# Altium PCB Mako DSP R1.4.PcbDoc (part 2 of 2)
Units mil, origin at the board's own origin, x right, y up, seen from the top; angles counter-clockwise.
Board outline 4040 x 2100 mil, 4 copper layers (Top Layer, GND, Power, Bottom Layer); 157 components, 143 nets, 609 pads, 252 vias.
Unrouted connection lines stored in the file: 4.
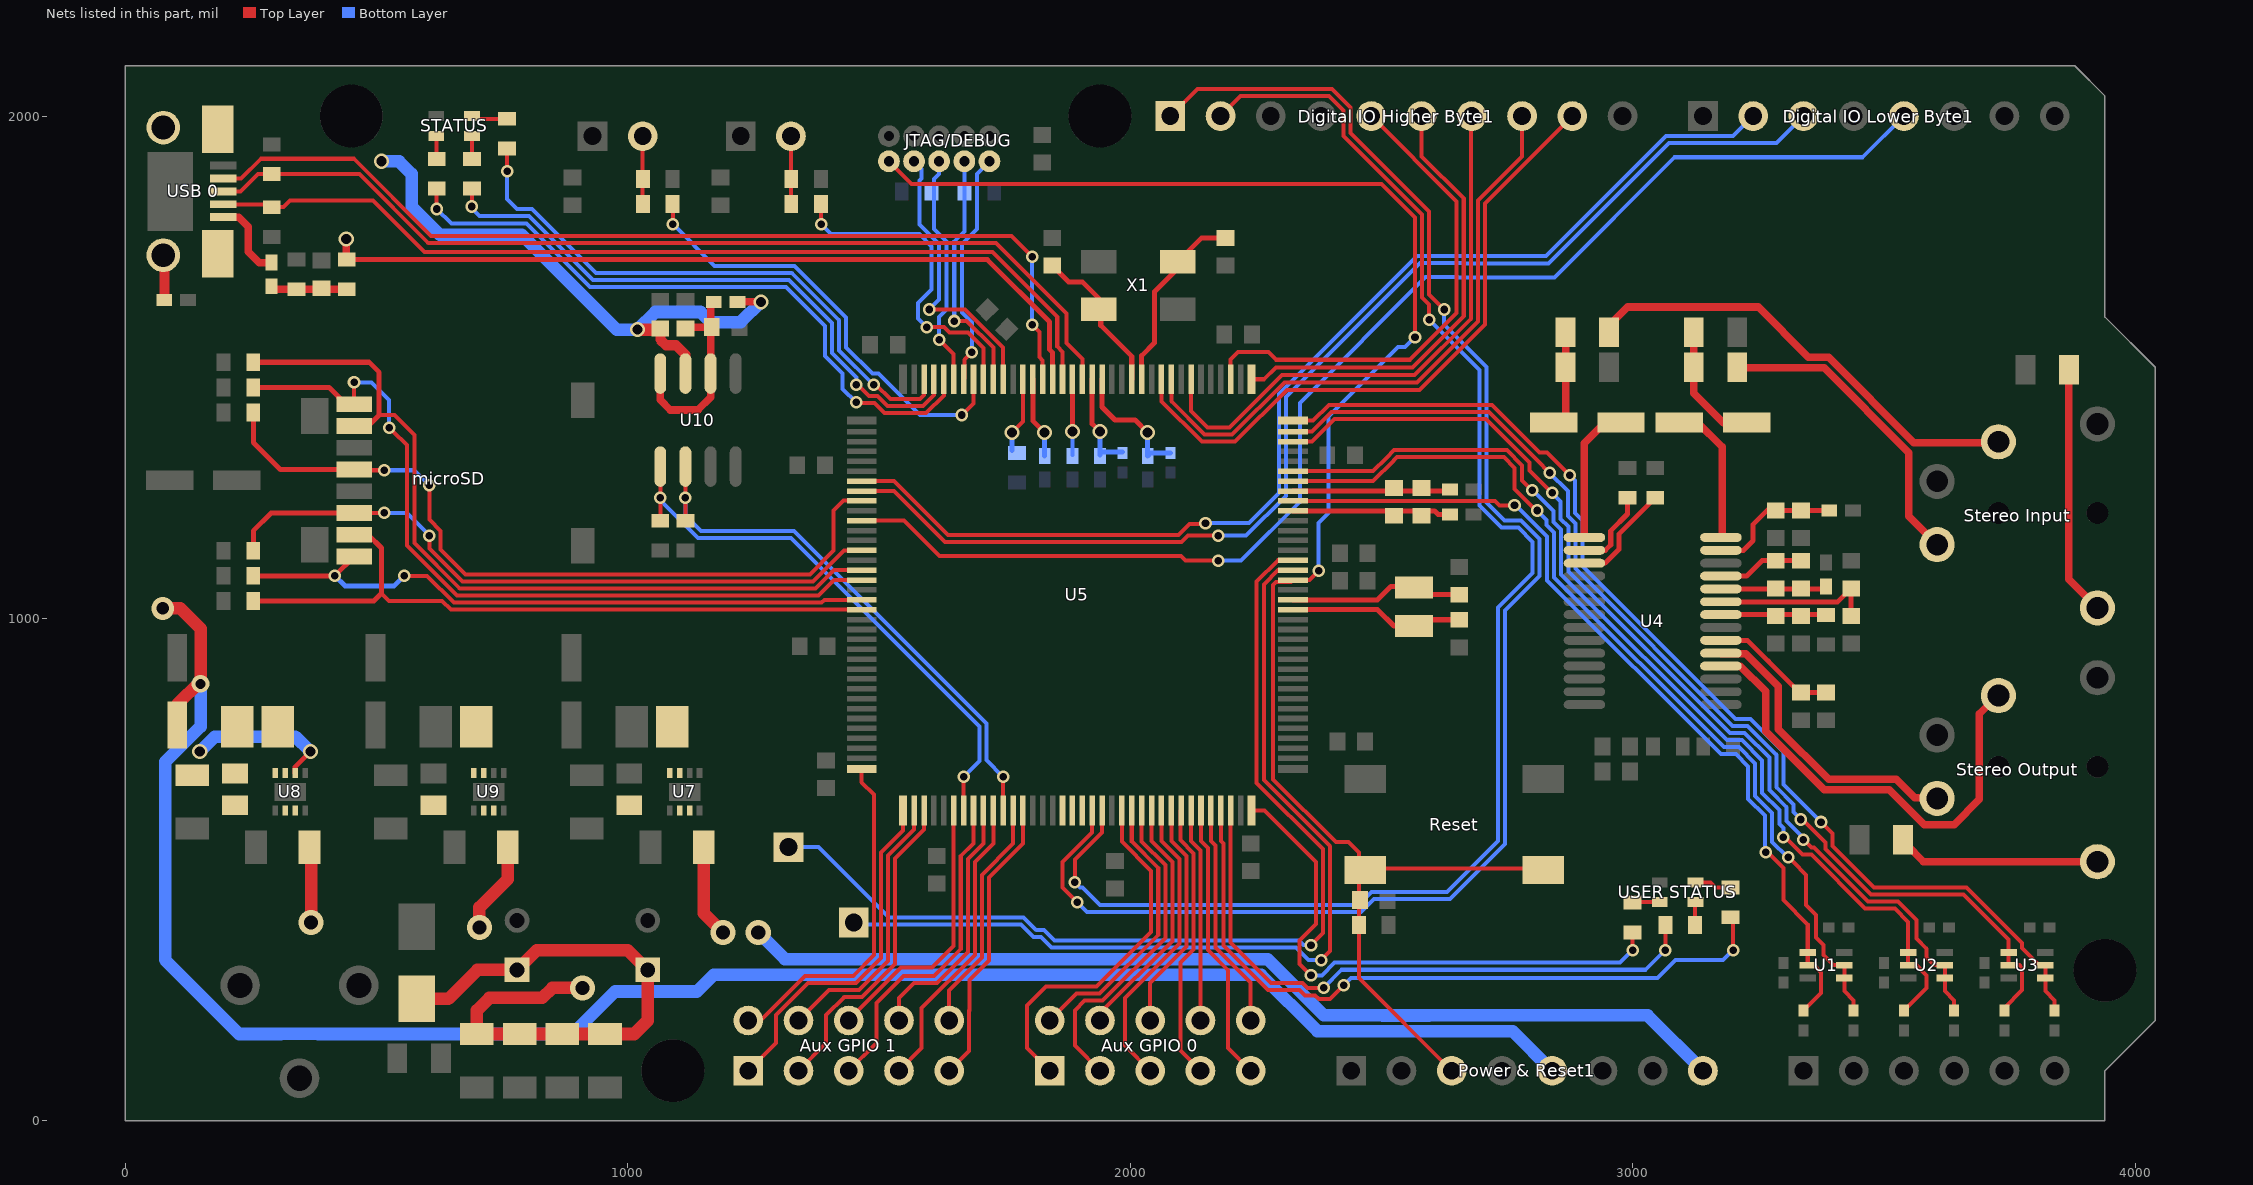
[diagram p4: the nets of this part, all layers, seen from the top]

## Via types
v1: diameter 30, hole 20, Top Layer to Bottom Layer, 120 vias
v2: diameter 25, hole 15, Top Layer to Bottom Layer, 115 vias
v3: diameter 50, hole 28, Top Layer to Bottom Layer, 7 vias
v4: diameter 19.68, hole 7.87, Top Layer to Bottom Layer, 6 vias
v5: diameter 45, hole 25, Top Layer to Bottom Layer, 2 vias
v6: diameter 35, hole 20, Top Layer to Bottom Layer, 1 vias
v7: diameter 45, hole 28, Top Layer to Bottom Layer, 1 vias

## Nets (pads, with @x,y where several pads share a name; then routed paths per layer and width w, separated by ;. In a path a pad name is that pad's centre, name@x,y a point inside that pad or via, vN(x,y) a via of type N, cw(c..) or ccw(c..) an arc to the next point about the centre after c; other vN are vias at no path point) (continued)
"NetAux GPIO 0_1": "Aux GPIO 0.1" U5.95 | length 722.2
  Top Layer w8: 1840,100 1795,145 1795,230 1832.53,267.53 1933.53,267.53 2042,375.99 2042,498 1983.58,556.42 U5.95@1983.58,617.91
"NetAux GPIO 0_2": "Aux GPIO 0.2" U5.96 | length 556.1
  Top Layer w8: 1840,200 1893.53,253.53 1939.33,253.53 2056,370.2 2056,503.8 2003.27,556.53 U5.96@2003.27,617.91
"NetAux GPIO 0_3": "Aux GPIO 0.3" U5.97 | length 653.5
  Top Layer w8: 1940,100 1890,150 1890,220 1909.53,239.53 1945.13,239.53 2070,364.4 2070,509.6 2023,556.6 U5.97@2022.95,617.91 U5.97@2022.95,617.91
"NetAux GPIO 0_4": "Aux GPIO 0.4" U5.98 | length 494.7
  Top Layer w8: 1940,200 1940,214.6 2084,358.6 2084,515.4 2042.64,556.76 U5.98@2042.64,617.91
"NetAux GPIO 0_5": "Aux GPIO 0.5" U5.99 | length 598.1
  Top Layer w8: 2040,100 1990,150 1990,244.8 2098,352.8 2098,521.2 2062.32,556.87 U5.99@2062.32,617.91
"NetAux GPIO 0_6": "Aux GPIO 0.6" U5.100 | length 460.2
  Top Layer w8: 2040,200 2040,275 2112,347 2112,526.99 2082.01,556.99 U5.100@2082.01,617.91
"NetAux GPIO 0_7": "Aux GPIO 0.7" U5.101 | length 556
  Top Layer w8: U5.101@2100,617.91 2100,558.79 2126,532.79 2126,341.2 2100,315.2 2100,140 2140,100
"NetAux GPIO 0_8": "Aux GPIO 0.8" U5.102 | length 425.6
  Top Layer w8: U5.102@2121.38,617.91 2121.38,557.21 2140,538.59 2140,200
"NetAux GPIO 0_9": "Aux GPIO 0.9" U5.103 | length 558.9
  Top Layer w8: U5.103@2141.06,617.91 2141.06,557.33 2155,543.39 2155,340 2195,300 2195,145 2240,100
"NetAux GPIO 0_10": "Aux GPIO 0.10" U5.104 | length 450.7
  Top Layer w8: U5.104@2160.75,617.91 2160.75,557.44 2170,548.19 2170,345.4 2240,275.4 2240,200
"NetAux GPIO 1_1": "Aux GPIO 1.1" U5.73 | length 701.6
  Top Layer w8: 1240,100 1295,155 1295,210.9 1359.1,275 1454.8,275 1504,324.2 1504,534 1548.15,578.15 U5.73@1548.15,617.91
"NetAux GPIO 1_2": "Aux GPIO 1.2" U5.72 | length 684
  Top Layer w8: 1240,200 1264.3,200 1353.3,289 1449,289 1490,330 1490,650 1465.87,674.13 U5.72@1465.87,700.2
"NetAux GPIO 1_3": "Aux GPIO 1.3" U5.75 | length 642.1
  Top Layer w8: 1340,100 1395,155 1395,210.9 1431.1,247 1466.4,247 1532,312.6 1532,522.4 1589.88,580.28 U5.75@1589.88,617.91
"NetAux GPIO 1_4": "Aux GPIO 1.4" U5.74 | length 548.2
  Top Layer w8: 1340,200 1401,261 1460.6,261 1518,318.4 1518,528.2 1570.2,580.4 U5.74@1570.2,617.91
"NetAux GPIO 1_5": "Aux GPIO 1.5" U5.80 | length 656.4
  Top Layer w8: 1440,100 1495,155 1495,235.2 1548.8,289 1609.6,289 1662.94,342.33 1662.94,527.13 1688.31,552.5 U5.80@1688.31,617.91
"NetAux GPIO 1_6": "Aux GPIO 1.6" U5.78 | length 540.5
  Top Layer w8: 1440,200 1440,200.8 1544.2,305 1605.8,305 1648.94,348.13 U5.78@1648.94,617.91
"NetAux GPIO 1_7": "Aux GPIO 1.7" U5.82 | length 595.7
  Top Layer w8: 1540,100 1585,145 1585,224.8 1690.94,330.74 1690.94,515.53 1727.68,552.28 U5.82@1727.68,617.91
"NetAux GPIO 1_8": "Aux GPIO 1.8" U5.81 | length 514.1
  Top Layer w8: 1540,200 1540,245 1570,275 1615.4,275 1676.94,336.53 1676.94,521.33 1707.99,552.39 U5.81@1707.99,617.91
"NetAux GPIO 1_9": "Aux GPIO 1.9" U5.85 | length 578.7
  Top Layer w8: 1640,100 1679.53,139.53 1679.53,219.53 1680,220 1680,280.2 1718.94,319.14 1718.94,484.14 1786.73,551.93 U5.85@1786.73,617.91
"NetAux GPIO 1_10": "Aux GPIO 1.10" U5.84 | length 470.5
  Top Layer w8: 1640,200 1640,260 1704.94,324.94 1704.94,489.94 1767.05,552.05 U5.84@1767.05,617.91
NetC10_1: C10.1 C11.1 FB13.1 U4.27 | length 260.6
  Top Layer w10: U4.27@3175.83,1135.75 3220.56,1135.75 3240,1155.19 3240,1187.56 C10.1@3275,1222.56 ; C10.1@3285,1215.12 3285.04,1215.16 FB13.1@3391.54,1215.16
NetC12_2: C12.2 C13.2 R3.1 U4.22 | length 209.5
  Top Layer w10: U4.22@3175.83,1007.8 3384.29,1007.8 R3.1@3385,1007.09
NetC14_1: C14.1 C15.1 FB17.1 U4.24 | length 209.2
  Top Layer w10: U4.24@3175.83,1058.98 FB17.1@3385,1058.98
NetC14_2: C14.2 C15.2 U4.25 | length 171.8
  Top Layer w10: U4.25@3175.83,1084.57 3227.01,1084.57 3257.56,1115.12 C15.2@3335,1115.12
NetC16_2: C16.2 C17.2 U4.23 | length 325.8
  Top Layer w10: U4.23@3175.83,1033.39 3176.65,1032.56 3407.56,1032.56 C16.2@3435,1060 C17.2@3435,1005.12
NetC18_2: C18.2 C19.2 U4.20 | length 252.3
  Top Layer w10: U4.20@3175.83,956.61 3228.39,956.61 3270,915 3332.46,852.56 C19.2@3385,852.56
NetC20_1: C20.1 U4.1 | length 277.5
  Top Layer w15: U4.1@2904.17,1161.34 2904.17,1349.17 2945,1390 C20.1@2976.93,1390
NetC20_2: C20.2 C21.2 R4.1 | length 181.5
  Top Layer w15: C20.2@2863.07,1390 2866.69,1393.62 C21.2@2866.69,1500 R4.1@2866.69,1570
NetC22_1: C22.1 U4.28 | length 286.9
  Top Layer w15: C22.1@3093.07,1390 3130,1390 3178.66,1341.34 3178.66,1164.17 U4.28@3175.83,1161.34
NetC22_2: C22.2 C23.2 R5.1 | length 251.1
  Top Layer w15: C23.2@3121.69,1570 3121.69,1448.31 3180,1390 C22.2@3226.93,1390
NetC24_2: C24.2 FB2.2 U5.16 | length 261.1
  Top Layer w10: U5.16@1944.21,1476.18 1944.21,1420.79 1970,1395 2010,1395 v1(2035,1370)
  Bottom Layer w10: v1(2035,1370) FB2.2@2035,1323.62 2041.06,1329.69 C24.2@2080,1329.69
NetC25_2: C25.2 FB1.2 U5.17 | length 195.9
  Top Layer w10: U5.17@1924.53,1476.18 1924.53,1387.52 v1(1940,1372.05)
  Bottom Layer w10: FB1.2@1940,1325.67 v1(1940,1372.05) ; FB1.2@1946.06,1331.73 C25.2@1985,1331.73
NetC30_1: C30.1 U5.13 X1.3 | length 306.3
  Top Layer w10: C30.1@1845,1702.44 1877.44,1670 1905,1670 1937.52,1637.48 X1.3@1937.52,1615.51 ; X1.3@1941.54,1615.51 1941.54,1583.46 2003.27,1521.73 U5.13@2003.27,1476.18
NetC31_2: C31.2 U5.12 X1.1 | length 378.4
  Top Layer w10: U5.12@2022.95,1476.18 2022.95,1522.95 2048.57,1548.57 2048.57,1650.34 2095,1696.77 X1.1@2095,1710 2142.56,1757.56 C31.2@2190,1757.56
NetC63_2: C63.2 C64.2 FB7.1 U10.6 U10.8 | length 417.3
  Top Layer w8: FB7.1@1165,1623.62 FB7.1@1171.38,1630
  Top Layer w15: U10.8@1065,1487.52 1065,1435 1085,1415 1140,1415 1165,1440 U10.6@1165,1487.52 C64.2@1165,1580 ; C63.2@1115,1577.44 1117.56,1580 C64.2@1165,1580 ; FB7.1@1165,1623.62 C64.2@1165,1580 ; C64.2@1167.44,1580 C64.2@1165,1580
NetC68_2: C68.2 FB10.1 R27.1 R29.1 | length 152.4
  Top Layer w10: FB10.1@290.96,1661.12 FB10.1@296.87,1655.21
  Top Layer w15: FB10.1@296.87,1655.21 R29.1@340.96,1655.21 R27.1@440.96,1655.21
NetDBGEN1_2: DBGEN.2 R15.2 R16.2 | length 134.5
  Top Layer w8: R15.2@1325,1825.47 DBGEN.2@1325,1960
NetFB3_1: FB3.1 U5.23 | length 162.3
  Top Layer w10: U5.23@1806.42,1476.18 1806.42,1393.58 v1(1830,1370)
  Bottom Layer w10: FB3.1@1830,1323.62 v1(1830,1370)
NetFB4_1: FB4.1 U5.19 | length 150.6
  Top Layer w8: U5.19@1885,1476.02 U5.19@1885.16,1476.18
  Top Layer w10: v1(1885,1372.05) U5.19@1885,1476.02
  Bottom Layer w8: FB4.1@1885,1325.67 v1(1885,1372.05)
NetFB10_2: "USB 0.1" FB10.2 | length 162.7
  Top Layer w15: 195,1798.82 226.18,1798.82 245,1780 245,1730 266.64,1708.36 FB10.2@290.96,1708.36
NetFB12_1: "USB 0.6" "USB 0.7" "USB 0.8" "USB 0.9" FB12.1 | length 89.8
  Top Layer w8: 75.91,1723.03 77.91,1721.02
  Top Layer w20: FB12.1@77.91,1634.02 77.91,1721.02
NetFB14_1: "Stereo Input.5" FB14.1 | length 493.3
  Top Layer w15: FB14.1@3868.31,1495 3868.31,1077.72 3915,1031.02 3925,1031.02
NetFB15_1: "Stereo Output.5" FB15.1 | length 423.5
  Top Layer w15: FB15.1@3538.31,545 3544.15,550.85 3578.98,516.02 3945,516.02
NetJ3_4: "USB 0.4" U5.22 | length 1959.7
  Top Layer w8: 195,1875.59 230.59,1875.59 270,1915 455.25,1915 608.99,1761.27 1763.73,1761.27 v2(1805,1720) ; v2(1805,1585) 1820,1570 1820,1520 1826.1,1513.9 U5.22@1826.1,1476.18
  Bottom Layer w8: v2(1805,1585) v2(1805,1720)
NetL1_1: L1.1 U7.7
NetL2_1: L2.1 U8.7
NetL3_1: L3.1 U9.7
NetR4_2: "Stereo Input.4" R4.2 | length 920
  Top Layer w15: R4.2@2953.31,1570 2953.31,1583.31 2990,1620 3250,1620 3350,1520 3390,1520 3560,1350 3716.42,1350 3728.15,1361.73
NetR5_2: "Stereo Input.1" R5.2 | length 627.7
  Top Layer w15: R5.2@3208.31,1500 R5.2@3213.31,1500 ; R5.2@3213.31,1486.69 R5.2@3213.31,1500 ; 3606.1,1157.01 3596.1,1157.01 3550,1203.11 3550,1330.3 3381.3,1499 3214.31,1499 R5.2@3213.31,1500
NetR6_2: R6.2 U4.2 | length 164.6
  Top Layer w10: U4.2@2904.17,1135.75 2945.75,1135.75 2956.51,1146.51 2956.51,1174.61 2990,1208.1 R6.2@2990,1240.47
NetR7_2: R7.2 U4.3 | length 212.7
  Top Layer w10: U4.3@2904.17,1110.16 2945.16,1110.16 2972.51,1137.51 2972.51,1167.98 R7.2@3045,1240.47
NetR8_2: R8.2 U5.24 | length 150.7
  Top Layer w8: v1(1765,1370) 1786.73,1391.73 U5.24@1786.73,1476.18
  Bottom Layer w10: R8.2@1765,1334.53 v1(1765,1370)
NetR13_2: R13.2 R14.2 TRST.2 | length 134.5
  Top Layer w8: R13.2@1030,1825.47 TRST.2@1030,1960
NetR15_1: R15.1 U5.28 | length 650.4
  Top Layer w8: R15.1@1384.53,1825 1385,1824.53 v2(1385,1785) ; v2(1595,1580) 1630,1580 1640.45,1569.55 1677.27,1569.55 1707.99,1538.83 U5.28@1707.99,1476.18
  Bottom Layer w8: v2(1385,1785) 1405,1765 1580.4,1765 1605,1740.4 1605,1655 1577.5,1627.5 1577.5,1597.5 v2(1595,1580)
NetR19_1: R19.1 U7.8
NetR20_1: R20.1 U8.8
NetR21_1: R21.1 U9.8
NetR23_2: R23.2 STATUS.3 | length 46.1
  Top Layer w8: R23.2@690,1914.53 STATUS.3@690,1960.63
NetR24_1: R24.1 STATUS.4 | length 46.5
  Top Layer w8: STATUS.4@619.13,1960.63 619.13,1915.39 R24.1@620,1914.53
NetR25_2: R25.2 STATUS.2 | length 72.3
  Top Layer w8: STATUS.2@690,2000 695.47,1994.53 R25.2@760,1994.53
NetR26_2: "USER STATUS.3" R26.2 | length 45.8
  Top Layer w8: R26.2@3124.53,390 3124.53,435.16 3125,435.63
NetR28_1: "USER STATUS.4" R28.1 | length 54.6
  Top Layer w8: R28.1@3000,434.53 3001.1,435.63 3054.13,435.63
NetR30_2: "USER STATUS.2" R30.2 | length 74.3
  Top Layer w8: 3125,475 3155,475 3165.47,464.53 R30.2@3195,464.53
NetR34_2: R34.2 U1.1 U1.2 U5.136 | length 1745.8
  Top Layer w8: U5.136@2324.13,1234.05 2324.33,1233.86 2726.14,1233.86 2735,1225 v2(2765,1225) ; v2(3265,535) 3268.18,535 3300,503.18 3300,440 3348.58,391.42 U1.1@3348.58,335.59 U1.2@3348.58,310 3361.07,310 3375.31,295.76 3375.31,255 R34.2@3340,219.69
  Bottom Layer w8: v2(2765,1225) 2768.18,1225 2830,1163.18 2830,1076.01 3176.01,730 3205.67,730 3230,705.67 3230,641.01 3263.5,607.51 3263.5,536.5 v2(3265,535)
NetR35_2: R35.2 U1.4 U1.5 U5.138 | length 1847.2
  Top Layer w8: U5.138@2324.13,1273.43 2483.58,1273.43 2524,1313.85 2524,1314 2531,1321 2744,1321 2765,1300 2765,1258.18 2808.18,1215 v2(2810,1215) ; 3320,515 3345,490 3345,430 3365,410 3365,365 3380,350 3380,330 3400,310 U1.5@3421.42,310 U1.4@3421.42,284.41 3421.42,258.58 3440,240 R35.2@3440,219.69
  Bottom Layer w8: v2(2810,1215) 2829,1196 2829,1186 2844,1171 2844,1081.8 3181.8,744 3211.47,744 3244,711.47 3244,646.8 3277.5,613.3 3277.5,555.68 3308.18,525 v2(3310,525)
NetR36_2: R36.2 U2.1 U2.2 U5.139 | length 1998.1
  Top Layer w8: U5.139@2324.13,1293.11 2483.47,1293.11 2510,1319.64 2510,1319.8 2525.2,1335 2750,1335 2780,1305 2780,1275 v2(2800,1255) ; v2(3300,565) 3303.18,565 3338.18,530 3355.6,530 3462.6,423 3522,423 3548.58,396.42 U2.1@3548.58,335.59 U2.2@3548.58,310 3565,310 3585,290 3585,265 3540,220 R36.2@3540,219.69
  Bottom Layer w8: v2(2800,1255) 2801.82,1255 2843,1213.82 2843,1192 2858,1177 2858,1087.6 3187.6,758 3217.27,758 3258,717.27 3258,652.6 3292,618.6 3292,591.38 3300,583.38 v2(3300,565)
NetR37_2: R37.2 U2.4 U2.5 U5.142 | length 2034
  Top Layer w8: U5.142@2324.13,1352.17 2362.17,1352.17 2407,1397 2708.4,1397 2795,1310.4 2795,1295 v2(2840,1250) ; v2(3340,560) 3356,544 3361.4,544 3468.4,437 3528,437 3565,400 3565,362.8 3585,342.8 3585,325 3600,310 U2.5@3621.42,310 U2.4@3621.42,284.41 3621.42,258.58 3640,240 R37.2@3640,219.69
  Bottom Layer w8: v2(2840,1250) 2857,1233 2857,1198.2 2872,1183.2 2872,1093.4 3193.4,772 3223.07,772 3272,723.07 3272,658.4 3306,624.4 3306,597.18 3340,563.18 v2(3340,560)
NetR38_2: R38.2 U3.1 U3.2 U5.143 | length 2191.8
  Top Layer w8: U5.143@2324.13,1371.85 2362.05,1371.85 2401.2,1411 2714.2,1411 2810,1315.2 2810,1315 v2(2835,1290) ; v2(3335,600) 3338.18,600 3384,554.18 3384,541.2 3474.2,451 3659,451 3748.58,361.42 U3.1@3748.58,335.59 U3.2@3748.58,310 3770,310 3775.31,304.68 3775.31,260.32 3740,225 R38.2@3740,219.69
  Bottom Layer w8: v2(2835,1290) 2871,1254 2871,1204 2886,1189 2886,1099.2 3199.2,786 3228.87,786 3286,728.87 3286,664.2 3320,630.2 3320,615 v2(3335,600)
NetR39_2: R39.2 U3.4 U3.5 U5.144 | length 2219.6
  Top Layer w8: U5.144@2324.13,1393.9 2364.3,1393.9 2395.4,1425 2720,1425 2815,1330 2830,1330 v2(2875,1285) ; v2(3375,595) 3398,572 3398,547 3480,465 3665,465 3775.31,354.68 3775.31,343.93 3809.24,310 U3.5@3821.42,310 U3.4@3821.42,284.41 3821.42,258.58 3840,240 R39.2@3840,219.69
  Bottom Layer w8: v2(2875,1285) 2885,1275 2885,1210 2900,1195 2900,1105 3205,800 3234.66,800 3300,734.66 3300,670 v2(3375,595)
NetR40_2: microSD.1 R40.2 U5.55 | length 1306.3
  Top Layer w8: v2(555.47,1085.08) 600.73,1085.08 654.28,1031.52 1385.92,1031.52 1391.6,1037.2 U5.55@1465.87,1037.2
  Top Layer w10: R40.2@255,1085 v2(417.32,1085) microSD.1@455.75,1123.43
  Bottom Layer w10: v2(417.32,1085) 437.32,1065 535.39,1065 v2(555.47,1085.08)
NetR41_2: microSD.2 R41.2 U5.56 | length 1386.1
  Top Layer w8: 510,1050 524.92,1035.08 630.93,1035.08 648.49,1017.52 U5.56@1465.87,1017.52
  Top Layer w10: R41.2@255,1035 495,1035 510,1050 510,1140.47 483.74,1166.73 microSD.2@455.75,1166.73
NetR42_2: microSD.3 R42.2 U5.50 | length 1362.2
  Top Layer w8: microSD.3@455.79,1210.08 v2(515.47,1210.08) ; v2(605.47,1165.08) 605.47,1139.73 671.68,1073.52 1368.52,1073.52 1430.63,1135.63 U5.50@1465.87,1135.63
  Top Layer w10: R42.2@255,1135 255,1174.53 290.51,1210.04 microSD.3@455.75,1210.04
  Bottom Layer w8: v2(515.47,1210.08) 560.47,1210.08 v2(605.47,1165.08)
NetR43_2: microSD.5 R43.2 U5.45 | length 1546
  Top Layer w8: microSD.5@457.32,1295.08 v2(515.47,1295.08) ; v2(605.47,1265.08) 605.47,1196.9 627.97,1174.4 627.97,1137.03 677.48,1087.52 1362.52,1087.52 1410,1135 1410,1215 1430,1235 U5.45@1465,1235
  Top Layer w10: R43.2@255,1410 255,1350.47 308.82,1296.65 microSD.5@455.75,1296.65
  Bottom Layer w8: v2(515.47,1295.08) 575.47,1295.08 v2(605.47,1265.08)
NetR44_2: microSD.7 R44.2 U5.52 | length 1647.2
  Top Layer w8: 505.47,1405 535.55,1405 575.47,1365.08 575.47,1149.93 665.88,1059.52 1374.32,1059.52 1411.06,1096.26 U5.52@1465.87,1096.26
  Top Layer w10: R44.2@255,1510 485.47,1510 505.47,1490 505.47,1405 483.74,1383.27 microSD.7@455.75,1383.27
NetR45_2: microSD.8 R45.2 U5.53 | length 1581
  Top Layer w8: microSD.8@455.47,1426.85 v2(455.47,1470.08) ; v2@532.97,1372.58 560.47,1345.08 560.47,1145.13 660.08,1045.52 1380.12,1045.52 1411.17,1076.57 U5.53@1465.87,1076.57
  Top Layer w10: R45.2@255,1460 405.55,1460 microSD.8@440.47,1425.08
  Bottom Layer w8: v2(455.47,1470.08) 490.47,1470.08 525.47,1435.08 v2(525.47,1380.08)
NetRTCALARM1_1: RTCALARM.1 U5.129 | length 1840.9
  Top Layer w8: U5.129@2324.13,1096.26 2294.52,1096.26 2266,1067.74 2266,678.8 2398,546.8 2398,338 v2(2380,320)
  Bottom Layer w8: RTCALARM.1@1450,395 1454,391 1782.38,391 1807.38,366 1822.58,366 1843.58,345 2330,345 2355,320 v2(2380,320)
"NetStereo Output1_1": "Stereo Output.1" U4.19 | length 599.4
  Top Layer w15: U4.19@3175.83,931.02 3176.85,930 3225,930 3290,865 3290,780 3390,680 3524.7,680 3561.75,642.95 3606.1,642.95
"NetStereo Output1_4": "Stereo Output.4" U4.18 | length 956
  Top Layer w15: U4.18@3175.55,905.16 U4.18@3175.83,905.43 3214.57,905.43 3265,855 3265,775.3 3381.3,659 3511,659 3580,590 3640,590 3690,640 3690,810 3726.73,846.73 3748.15,846.73
NetU5_89: U5.89
NetU5_90: U5.90
NetU5_91: U5.91
NetU5_130: U5.130 WAKEUP.1 | length 1998.6
  Top Layer w8: U5.130@2324.13,1115.94 2294.41,1115.94 2252,1073.54 2252,673 2384,541 2384,374 v2(2360,350)
  Bottom Layer w8: WAKEUP.1@1320,545 1380,545 1520,405 1788.18,405 1813.18,380 1828.38,380 1849.38,359 2335.8,359 2344.8,350 v2(2360,350)
PWM_3: "Digital IO Lower Byte1.5" U5.47 | length 2589.4
  Top Layer w8: U5.47@1465.87,1194.68 1549.71,1194.68 1620.4,1124 2101,1124 2110,1115 v2(2175,1115)
  Bottom Layer w8: v2(2175,1115) 2220.6,1115 2338,1232.4 2338,1429.22 2588.28,1679.5 2651.72,1679.5 2652.22,1679 2844.6,1679 3083.6,1918 3458,1918 3540,2000
PWM_5: "Digital IO Lower Byte1.3" U5.44 | length 2383.2
  Top Layer w8: U5.44@1465.87,1253.74 1530.25,1253.74 1631.99,1152 2102,1152 2115,1165 v2(2175,1165)
  Bottom Layer w8: v2(2175,1165) 2231.01,1165 2310,1243.99 2310,1440.81 2576.69,1707.5 2663.31,1707.5 2663.81,1707 2833.01,1707 3072.01,1946 3286,1946 3340,2000
PWM_6: "Digital IO Lower Byte1.2" U5.43 | length 2279.8
  Top Layer w8: U5.43@1465.87,1273.43 1530.37,1273.43 1637.79,1166 2096.2,1166 2118.37,1188.17 2148.17,1188.17 v2(2150,1190)
  Bottom Layer w8: v2(2150,1190) 2236.21,1190 2296,1249.79 2296,1446.61 2570.89,1721.5 2669.11,1721.5 2669.61,1721 2827.21,1721 3066.21,1960 3200,1960 3240,2000
PWM_9: "Digital IO Higher Byte1.9" U5.10 | length 1304.4
  Top Layer w8: U5.10@2062.32,1476.18 2062.32,1432.27 2142.6,1352 2208.94,1352 2311.94,1455 2576.02,1455 2706,1584.98 2706,1826 2880,2000
PWM_10: "Digital IO Higher Byte1.8" U5.9 | length 1220.1
  Top Layer w8: U5.9@2082.01,1476.18 2082.01,1432.39 2148.4,1366 2203.14,1366 2307.14,1470 2571.22,1470 2692,1590.78 2692,1831.8 2780,1919.8 2780,2000
PWM_11: "Digital IO Higher Byte1.7" U5.7 | length 1127.5
  Top Layer w8: U5.7@2121.38,1476.18 2121.38,1412.82 2154.2,1380 2197.34,1380 2302.34,1485 2566.42,1485 2678,1596.58 2678,1998 2680,2000
PWM_12: "Digital IO Higher Byte1.6" U5.1 | length 906.8
  Top Layer w8: U5.1@2241.85,1476.18 2266.18,1476.18 2290,1500 2561.62,1500 2664,1602.38 2664,1835.8 2580,1919.8 2580,2000
PWM_13: "Digital IO Higher Byte1.5" U5.3 | length 1002
  Top Layer w8: U5.3@2200.12,1476.18 2200.12,1515.12 2215,1530 2275,1530 2290,1515 2556.82,1515 2650,1608.18 2650,1830 2480,2000
RESET: "Power & Reset1.3" C29.2 JTAG/DEBUG.10 R12.1 Reset.1 U5.128 | length 3471.6
  Top Layer w8: JTAG/DEBUG.10@1520,1910 1565,1865 2500,1865 2567,1798 v2(2567,1560) ; v2(2375,1095) 2356.57,1076.57 U5.128@2324.13,1076.57 2319.96,1072.4 2290.46,1072.4 2284.61,1066.54 2284.61,679.99 2409.6,555 2435,555 2455.47,534.53 R12.1@2455.47,390 2455.47,284.53 2640,100 ; Reset.1@2467.83,499.45 2470.89,502.5 2819.11,502.5 Reset.1@2822.17,499.45
  Bottom Layer w8: v2(2375,1095) 2375,1190 2395,1210 2395,1401.61 2533.39,1540 2547,1540 v2(2567,1560)
RTCX1: C35.2 U5.125 X2.1 | length 354.5
  Top Layer w10: U5.125@2324.13,1017.52 2492.48,1017.52 2525,985 2570,985 2582.56,997.56 C35.2@2660,997.56
RTCX2: C36.2 U5.126 X2.2 | length 332.6
  Top Layer w10: U5.126@2324.13,1037.2 2492.2,1037.2 2518.82,1063.82 X2.2@2570,1063.82 ; X2.2@2584.33,1047.44 C36.2@2660,1047.44
SHIELD_SCL: "Digital IO Higher Byte1.1" U5.92 | length 3201.2
  Top Layer w8: v2(1895,435) 1865,465 1865,515 1924.53,574.53 U5.92@1924.53,617.91 ; 2080,2000 2134,2054 2401.7,2054 2439,2016.7 2439,1966 2595,1810 2595,1645 v2(2625,1615)
  Bottom Layer w8: v2(1895,435) 1914,416 2459.78,416 2485.78,442 2636.8,442 2746,551.2 2746,1016 2815,1085 2815,1158.38 2778.38,1195 2744.8,1195 2709,1230.8 2709,1500.8 2625,1584.8 v2(2625,1615)
SHIELD_SDA: "Digital IO Higher Byte1.2" U5.93 | length 3010.1
  Top Layer w8: v2(1890,475) 1890,520.2 1944.21,574.41 U5.93@1944.21,617.91 ; 2180,2000 2220,2040 2395.9,2040 2425,2010.9 2425,1960.2 2581,1804.2 2581,1639 2595,1625 v2(2595,1595)
  Bottom Layer w8: v2(1890,475) 1900,465 1905,465 1940,430 2453.98,430 2479.98,456 2631,456 2732,557 2732,1021.8 2759.88,1049.68 2759.88,1049.88 2801,1091 2801,1152.58 2772.58,1181 2739,1181 2695,1225 2695,1495 v2(2595,1595)
STATUS_BLUE: R24.2 U5.32 | length 1327.4
  Top Layer w8: v2(620,1815) R24.2@620,1855.47 ; v2(1455,1430) 1456.5,1428.5 1491.5,1428.5 1511.35,1408.65 1593.65,1408.65 1629.25,1444.25 U5.32@1629.25,1476.18
  Bottom Layer w8: v2@620,1810.63 v2@620,1820.63 ; v2(620,1815) 649,1786 799,1786 925,1660 1315,1660 1393,1582 1393,1522.2 1428,1487.2 1428,1457 v2(1455,1430)
STATUS_GREEN: R23.1 U5.33 | length 1212.3
  Top Layer w8: v2(690,1820) R23.1@690,1855.47 ; v2(1455,1465) 1458.18,1465 1480.68,1442.5 1497.3,1442.5 1517.15,1422.65 1587.65,1422.65 1609.57,1444.57 U5.33@1609.57,1476.18
  Bottom Layer w8: v2@690,1825.63 690,1815.63 705,1800.63 804.17,1800.63 930.8,1674 1320.8,1674 1407,1587.8 1407,1528 1455,1480 v2(1455,1465)
STATUS_RED: R25.1 U5.34 | length 1165.1
  Top Layer w8: v2(760,1890) R25.1@760,1935.47 ; v2(1490,1465) 1494.6,1465 1522.94,1436.65 1581.65,1436.65 1589.88,1444.88 U5.34@1589.88,1476.18
  Bottom Layer w8: v2(760,1890) 760,1835 780,1815 809.6,1815 936.6,1688 1326.6,1688 1421,1593.6 1421,1533.8 1489.8,1465 v2(1490,1465)
TCK/SWDCLK: JTAG/DEBUG.4 R18.1 U5.27 | length 488.7
  Top Layer w8: v2(1650,1592.05) 1674.57,1592.05 1727.68,1538.94 U5.27@1727.68,1476.18
  Bottom Layer w8: v2(1650,1592.05) 1650,1750 1670,1770 JTAG/DEBUG.4@1670,1910
TDI: JTAG/DEBUG.8 U5.26 | length 569
  Top Layer w8: v2@1600,1614.55 1671.87,1614.55 1747.36,1539.06 U5.26@1747.36,1476.18
  Bottom Layer w8: JTAG/DEBUG.8@1570,1910 1585,1895 1585,1876.11 1580.75,1871.86 1580.75,1784.45 1620,1745.2 1620,1635 v2(1600,1615)
TDO/SWO: JTAG/DEBUG.6 R17.1 U5.31 | length 466.5
  Top Layer w8: v2(1620,1555) 1648.94,1526.06 U5.31@1648.94,1476.18
  Bottom Layer w8: v2(1620,1555) 1620,1600 1635,1615 1635,1750 1610,1775 1610,1875 1620,1885 JTAG/DEBUG.6@1620,1910
TMS/SWDIO: JTAG/DEBUG.2 U5.30 | length 471.7
  Top Layer w8: U5.30@1668.62,1476.18 1670,1477.56 1670,1515 v2(1685,1530)
  Bottom Layer w8: v2(1685,1530) 1685,1588.87 1665,1608.87 1665,1745.2 1695,1775.2 1695,1885 JTAG/DEBUG.2@1720,1910
TRST: R13.1 U5.29 | length 887.8
  Top Layer w8: v2@1090,1785.47 R13.1@1090,1825 ; v2(1665,1405) 1688.31,1428.31 U5.29@1688.31,1476.18
  Bottom Layer w8: v2(1090,1785) 1173,1702 1332.4,1702 1435,1599.4 1435,1539.6 1487.1,1487.5 1499.32,1487.5 1581.82,1405 v2(1665,1405)
USB0_N: "USB 0.2" R33.1 U5.20 | length 1892.3
  Top Layer w8: 195,1824.41 285.67,1824.41 R33.1@291.54,1818.54 315,1818.54 328.46,1832 493,1832 595.73,1729.27 1725.73,1729.27 1855,1600 1855,1541.21 1865.47,1530.74 U5.20@1865.47,1476.18
USB0_P: "USB 0.3" R32.1 U5.18 | length 1951.5
  Top Layer w8: 195,1850 230,1850 264.49,1884.49 R32.1@291.54,1884.49 465.97,1884.49 603.19,1747.27 1733.19,1747.27 1873,1607.46 1873,1548.67 1904.84,1516.83 U5.18@1904.84,1476.18
USB0_PPWR: R47.2 U5.79 U10.1 | length 1114.4
  Top Layer w8: R47.2@1065,1194.53 v2(1065,1240) U10.1@1065,1302.48 ; U5.79@1668.62,617.91 v2(1668.62,685)
  Bottom Layer w8: v2(1065,1240) 1065,1235.2 1140.2,1160 1325.2,1160 1700,785.2 1700,716.38 v2(1668.62,685)
USB0_PPWR_FAULT: R22.2 U5.83 U10.2 | length 1100.3
  Top Layer w8: R22.2@1115,1194.53 v2(1115,1240) U10.2@1115,1302.48 ; U5.83@1747.36,617.91 v2(1747.36,685)
  Bottom Layer w8: v2(1115,1240) 1115,1205 1146,1174 1331,1174 1714,791 1714,718.36 v2(1747.36,685)
USB0_VBUS: "Power & Reset1.5" C57.2 C58.1 C62.2 FB7.2 L2.2 R20.2 R27.2 U5.21 U8.6 U10.7 | length 6920.5
  Top Layer w10: U8.6@338.32,692.4 338.32,704.84 v1(368.48,735) ; R27.2@440.96,1714.27 1715.73,1714.27 1840,1590 1840,1535 1845.79,1529.21 U5.21@1845.79,1476.18
  Top Layer w15: R27.2@440,1715.23 v1(440,1755) ; FB7.2@1218.62,1630 v1(1265,1630)
  Top Layer w20: C62.2@1065,1577.44 1065,1555 1076.13,1543.87 1096.13,1543.87 1115,1525 U10.7@1115,1487.52
  Top Layer w25: v5(75,1020) 110,1020 150,980 150,875 103.48,828.48 C58.1@103.48,788.07 ; v1(1020,1575) C62.2@1062.56,1575
  Bottom Layer w25: v1(148.48,735) 178.48,765 338.48,765 v1(368.48,735) ; v6(150,870) 150,785 79.5,714.5 79.5,320.5 226.85,173.15 309.4,173.15 310.08,173.83 383.7,173.83 384.38,173.15 890.47,173.15 975,257.68 1137.68,257.68 1171,291 2260.76,291 2372.76,179 2389.94,179 ; v1(510,1910) 545,1910 570,1885 570,1820 626.5,1763.5 789.68,1763.5 978.18,1575 v1(1020,1575) 1055,1610 1145,1610 1165,1590 1225,1590 v1(1265,1630) ; 2389.97,179.03 2490.03,179.03 ; 2490.06,179 2607.24,179 ; 2607.27,179.03 2760.97,179.03 2840,100
USER_STATUS_BLUE: R28.2 U5.108 | length 1114.7
  Top Layer w8: U5.108@2241.85,617.91 2267.09,617.91 2370,515 2370,391.82 2337.5,359.32 2337.5,312.5 v2(2360,290) ; v2(3000,340) R28.2@3000,375.47
  Bottom Layer w8: v2(2360,290) 2381.82,290 2406.82,315 2975,315 v2(3000,340)
USER_STATUS_GREEN: R26.1 U5.106 | length 1246.4
  Top Layer w8: U5.106@2200.12,617.91 2200.12,354.88 2280,275 2343.18,275 2353.18,265 v2(2385,265) ; v2(3065,340) 3065.47,340.47 R26.1@3065.47,390
  Bottom Layer w8: v2(2385,265) 2421,301 3026,301 v2(3065,340)
USER_STATUS_RED: R30.1 U5.105 | length 1437.1
  Top Layer w8: U5.105@2180.43,617.91 2180.43,557.56 2186.12,551.87 2186.12,349.08 2274.2,261 2337.38,261 2348.38,250 2368.18,250 2375.68,242.5 2397.5,242.5 v2(2425,270) ; R30.1@3195,405.47 3200,400.47 v2(3200,340)
  Bottom Layer w8: v2(2425,270) 2440,285 3050,285 3085,320 3180,320 v2(3200,340)
VDDA: C33.2 C34.2 FB5.2 U5.137 | length 313.6
  Top Layer w10: U5.137@2324.13,1253.74 2633.07,1253.74 FB5.2@2636.38,1257.05
VIN: "Power & Reset1.8" C7.2 C51.1 C52.1 C53.2 C56.2 C59.2 C72.2 C73.2 C74.2 D2.1 U7.2 U7.3 U8.2 U8.3 U9.2 U9.3 | length 3757.6
  Top Layer w25: C56.2@366.63,545 370,541.63 v3(370,395) ; D2.1@580,243.15 643.15,243.15 700.79,300.79 C52.1@780,300.79 819.21,340 1000,340 C51.1@1039.21,300.79 ; v3(705,385) 705,425 761.63,481.63 C59.2@761.63,545 ; v3(910,265) 850,265 830,245 725,245 700,220 C74.2@700,173.15 C7.2@785,173.15 C72.2@870,173.15 C73.2@955,173.15 1013.15,173.15 1040,200 C51.1@1040,300.79 ; C53.2@1151.63,545 1151.63,413.37 v3(1190,375)
  Bottom Layer w25: v3(1260,375) 1313,322 2273.6,322 2385.57,210.03 2502.87,210.03 ; 2502.9,210 2594.4,210 ; 2594.43,210.03 3029.97,210.03 3140,100
VSSA: C33.1 C34.1 FB6.2 U5.135 | length 315.3
  Top Layer w10: U5.135@2324.13,1214.37 2605.63,1214.37 2612.95,1207.05 FB6.2@2636.38,1207.05
pads on no net: "Power & Reset1.1" "Stereo Input.3" "Stereo Input.6" "Stereo Input." "Stereo Output.3" "Stereo Output.6" "Stereo Output." "USB 0.GND" JTAG/DEBUG.1@1795.59,1991.5 JTAG/DEBUG.7 U5.2 U5.6 U5.8 U5.15 U5.35 U5.37 U5.38 U5.39 U5.54 U5.57 U5.58 U5.60 U5.61 U5.62 U5.63 U5.64 U5.65 U5.66 U5.67 U5.68 U5.69 U5.70 U5.115 U5.117 U5.121 U5.122 U5.123 U5.124 U5.132 U5.133 U5.134 U5.140 U10.4 U10.5

## Polygon pours and split planes (outlines as drawn)
GND on Top Layer "Power Plane-No Net" (solid, remove dead copper, pour order 35): 683.48,626.93 745,626.93 745,596.5 798.48,596.5 798.48,490 848.48,490 848.48,845 758.48,845 758.48,677.64 683.48,677.64
GND on Top Layer "Power Plane-No Net" (solid, remove dead copper, pour order 29): 703.48,490 463.48,490 463.48,650 578.48,650 578.48,598.39 673.48,598.39 673.48,634.52 703.48,634.52
GND on Top Layer "Power Plane-No Net" (solid, remove dead copper, pour order 34): 1073.48,626.93 1135,626.93 1135,596.5 1188.48,596.5 1188.48,490 1238.48,490 1238.48,845 1148.48,845 1148.48,677.64 1073.48,677.64
GND on Top Layer "Power Plane-No Net" (solid, remove dead copper, pour order 36): 288.48,626.93 350,626.93 350,596.5 403.48,596.5 403.48,490 453.48,490 453.48,845 363.48,845 363.48,677.64 288.48,677.64
VIN on Top Layer "Power Plane-No Net" (solid, remove dead copper, pour order 27): 308.48,490 403.48,490 403.48,598.75 343.48,598.75 343.48,635 308.48,635
VIN on Top Layer "Power Plane-No Net" (solid, remove dead copper, pour order 26): 703.48,490 800,490 800,598.75 739.04,598.75 739.04,635 703.48,635
VIN on Top Layer "Power Plane-No Net" (solid, remove dead copper, pour order 25): 1093.48,490 1188.48,490 1188.48,598.75 1128.48,598.75 1128.48,635 1093.48,635
USB0_VBUS on Top Layer "Power Plane-No Net" (solid, remove dead copper, pour order 33): 68.48,650 183.48,650 183.48,665 248.48,665 248.48,735 263.48,735 263.48,845 68.48,845
no net on Top Layer "Power Plane-No Net" (solid, remove dead copper, pour order 39): 183.48,665 183.48,600 278.48,600 278.48,635 308.48,635 308.48,710 248.48,710 248.48,665 183.48,665
no net on Top Layer "Power Plane-No Net" (solid, remove dead copper, pour order 42): 263.48,845 353.48,845 353.48,715 333.48,715 333.48,675 303.48,675 303.48,710 263.48,710
DVDD on Top Layer "Power Plane-No Net" (solid, remove dead copper, pour order 32): 463.48,650 578.48,650 578.48,665 643.48,665 643.48,735 658.48,735 658.48,845 463.48,845
AVDD on Top Layer "Power Plane-No Net" (solid, remove dead copper, pour order 31): 853.48,650 968.48,650 968.48,665 1033.48,665 1033.48,735 1048.48,735 1048.48,845 853.48,845
NetR21_1 on Top Layer "Power Plane-No Net" (solid, remove dead copper, pour order 38): 578.48,665 578.48,600 673.48,600 673.48,635 703.48,635 703.48,710 643.48,710 643.48,665 578.48,665
no net on Top Layer "Power Plane-No Net" (solid, remove dead copper, pour order 37): 968.48,665 968.48,600 1063.48,600 1063.48,635 1093.48,635 1093.48,710 1033.48,710 1033.48,665 968.48,665
GND on Top Layer "Power Plane-No Net" (solid, remove dead copper, pour order 30): 308.48,490 68.48,490 68.48,650 183.48,650 183.48,598.39 278.48,598.39 278.48,634.52 308.48,634.52
NetL3_1 on Top Layer "Power Plane-No Net" (solid, remove dead copper, pour order 41): 658.48,845 748.48,845 748.48,715 728.48,715 728.48,675 698.48,675 698.48,710 658.48,710
GND on Top Layer "Power Plane-No Net" (solid, remove dead copper, pour order 28): 1093.48,490 853.48,490 853.48,650 968.48,650 968.48,598.39 1063.48,598.39 1063.48,634.52 1093.48,634.52
no net on Top Layer "Power Plane-No Net" (solid, remove dead copper, pour order 40): 1048.48,845 1138.48,845 1138.48,715 1118.48,715 1118.48,675 1088.48,675 1088.48,710 1048.48,710
NetFB12_1 on Top Layer "Power Plane-No Net" (solid, remove dead copper, pour order 23): 35,1675 35,2025 220,2025 220,1675
GND on GND (split plane): 3919.9,2031.68 3919.9,1600 3920.29,1596.08 3921.43,1592.31 3923.29,1588.83 3925.79,1585.79 4019.9,1491.68 4019.9,208.32 3925.79,114.21 3923.29,111.17 3921.43,107.69 3920.29,103.92 3919.9,100 3919.9,20.1 20.1,20.1 20.1,2079.9 3871.68,2079.9
no net on Power (split plane): 1724.39,1989.98 1729.02,1988.86 1733.42,1987.04 1737.48,1984.55 1741.1,1981.46 1744.2,1977.84 1746.69,1973.78 1748.51,1969.38 1749.62,1964.75 1749.99,1960 1749.62,1955.25 1748.51,1950.62 1746.69,1946.22 1744.2,1942.16 1741.1,1938.54 1737.48,1935.45 1733.42,1932.96 1729.02,1931.14 1724.39,1930.02 1719.64,1929.65 1714.9,1930.02 1710.27,1931.14 1705.87,1932.96 1701.81,1935.45 1698.18,1938.54 1695.09,1942.16 1692.6,1946.22 1690.78,1950.62 1689.67,1955.25 1689.3,1960 1689.67,1964.75 1690.78,1969.38 1692.6,1973.78 1695.09,1977.84 1698.18,1981.46 1701.81,1984.55 1705.87,1987.04 1710.27,1988.86 1714.9,1989.98 1719.64,1990.35
no net on Power (split plane): 3044.88,137.09 3049.68,136.13 3054.31,134.56 3058.7,132.39 3062.77,129.68 3066.45,126.45 3069.68,122.77 3072.4,118.7 3074.56,114.31 3076.13,109.68 3077.09,104.88 3077.41,100 3077.09,95.12 3076.13,90.32 3074.56,85.69 3072.4,81.3 3069.68,77.23 3066.45,73.55 3062.77,70.32 3058.7,67.61 3054.31,65.44 3049.68,63.87 3044.88,62.91 3040,62.59 3035.12,62.91 3030.32,63.87 3025.69,65.44 3021.3,67.61 3017.23,70.32 3013.55,73.55 3010.32,77.23 3007.6,81.3 3005.44,85.69 3003.87,90.32 3002.91,95.12 3002.59,100 3002.91,104.88 3003.87,109.68 3005.44,114.31 3007.6,118.7 3010.32,122.77 3013.55,126.45 3017.23,129.68 3021.3,132.39 3025.69,134.56 3030.32,136.13 3035.12,137.09 3040,137.41
no net on Power (split plane): 1074.9,265.1 1005.1,265.1 1005.1,334.9 1074.9,334.9
AVDD on Power (split plane): 3919.9,1600 3920.29,1596.08 3921.43,1592.31 3923.29,1588.83 3925.79,1585.79 4019.9,1491.68 4019.9,208.32 3925.79,114.21 3923.29,111.17 3921.43,107.69 3920.29,103.92 3919.9,100 3919.9,20.1 1355.1,20.1 1355.1,340 1354.71,341.95 1353.6,343.6 1238.6,458.6 1236.95,459.71 1235,460.1 1147.11,460.1 998.6,608.6 996.95,609.71 995,610.1 860.1,610.1 860.1,822.89 977.11,939.9 1142.89,939.9 1264.9,817.89 1264.9,672.76 1265.29,670.81 1266.4,669.15 1619.44,316.11 1620.04,315.71 1619.9,315 1620.29,313.05 1621.4,311.4 1623.05,310.29 1625,309.9 2405,309.9 2406.95,310.29 2408.6,311.4 2437.11,339.9 2885,339.9 2886.95,340.29 2888.6,341.4 3043.6,496.4 3044.71,498.05 3045.1,500 3045.1,1267.89 3083.6,1306.4 3084.71,1308.05 3085.1,1310 3085.1,1712.89 3147.11,1774.9 3919.9,1774.9
no net on Power (split plane): 2944.96,137.67 2949.83,136.7 2954.54,135.1 2959,132.9 2963.13,130.14 2966.86,126.87 2970.14,123.13 2972.9,119 2975.1,114.54 2976.7,109.83 2977.67,104.96 2977.99,100 2977.67,95.04 2976.7,90.17 2975.1,85.46 2972.9,81 2970.14,76.87 2966.86,73.13 2963.13,69.86 2959,67.1 2954.54,64.9 2949.83,63.3 2944.96,62.33 2940,62.01 2935.04,62.33 2930.17,63.3 2925.46,64.9 2921,67.1 2916.87,69.86 2913.14,73.13 2909.86,76.87 2907.1,81 2904.9,85.46 2903.3,90.17 2902.33,95.04 2902.01,100 2902.33,104.96 2903.3,109.83 2904.9,114.54 2907.1,119 2909.86,123.13 2913.14,126.87 2916.87,130.14 2921,132.9 2925.46,135.1 2930.17,136.7 2935.04,137.67 2940,137.99
DVDD on Power (split plane): 3919.9,2031.68 3919.9,1785.1 3145,1785.1 3143.05,1784.71 3141.4,1783.6 3076.4,1718.6 3075.29,1716.95 3074.9,1715 3074.9,1312.11 3036.4,1273.6 3035.29,1271.95 3034.9,1270 3034.9,502.11 2882.89,350.1 2435,350.1 2433.05,349.71 2431.4,348.6 2402.89,320.1 1628.07,320.1 1627.76,321.66 1626.65,323.31 1275.1,674.87 1275.1,820 1274.71,821.95 1273.6,823.6 1148.6,948.6 1146.95,949.71 1145,950.1 975,950.1 973.05,949.71 971.4,948.6 851.4,828.6 850.29,826.95 849.9,825 849.9,610.1 20.1,610.1 20.1,809.9 120,809.9 121.95,810.29 123.6,811.4 124.71,813.05 125.1,815 125.1,920 125.1,1070 125.1,1345 125.1,1532.89 172.11,1579.9 375,1579.9 376.95,1580.29 378.6,1581.4 543.6,1746.4 544.71,1748.05 545.1,1750 545.1,2079.9 3871.68,2079.9
USB0_VBUS on Power (split plane): 534.9,1752.11 372.89,1590.1 170,1590.1 168.05,1589.71 166.4,1588.6 116.4,1538.6 115.29,1536.95 114.9,1535 114.9,1345 114.9,1070 114.9,920 114.9,820.1 20.1,820.1 20.1,2079.9 534.9,2079.9
VIN on Power (split plane): 1141.4,451.4 1143.05,450.29 1145,449.9 1232.89,449.9 1344.9,337.89 1344.9,20.1 20.1,20.1 20.1,599.9 992.89,599.9
no net on Power (split plane): 814.9,265.1 745.1,265.1 745.1,334.9 814.9,334.9

## Keep-outs
Keep-Out Layer:
  lines w10: 25,25 25,2075 3870,2075 3915,2030 3915,1590 4015,1490 4015,215 3915,115 3915,25 25,25

## Other copper
Power (plane layer: these items are gaps in the copper):
  circle w10: c3040,100 r42.43
  circle w10: c2940,100 r43.01
  circle w10: c1719.64,1960 r35.36
  lines w10: 0,605 995,605 1145,455 1235,455 1350,340 1350,0 ; 0,815 120,815 120,920 120,1070 120,1345 120,1535 170,1585 375,1585 540,1750 540,2100 ; 855,605 855,825 975,945 1145,945 1270,820 1270,672.76 1623.05,319.71 ; 1625,315 2405,315 2435,345 2885,345 3040,500 3040,1270 3080,1310 3080,1715 3145,1780 3940,1780 ; 740,260 740,340 820,340 820,260 740,260 ; 1000,260 1080,260 1080,340 1000,340 1000,260

## Silkscreen, mask and mechanical layers (free items; w line width, h text height)
Top Overlay:
  lines w10: 3290,445 3875,445
  text "Designed By" at 3325,1735 h75
  text "Mako DSP" at 2765,1700 h135
  text "Adam J. Vadala-Roth" at 3325,1675 h75
  text "Prototype R1.0" at 2765,1650 h75
  text "www.MakoDSP.io" at 3325,1625 h75
  text "Analog Inputs" at 3285,465 h78.74
Bottom Overlay:
  region: 2263 vertices and 0 holes, not listed, extent 257.18,88.57 1423,1139.99
  text "r" at 1780,560 h250
Mechanical 15:
  circle w5: c1940,2000 r62.5
  circle w5: c3940,300 r62.5
  lines w5: 0,0 3940,0 3940,100 4040,200 4040,1500 3940,1600 3940,2040 3880,2100 0,2100 0,0

## Text inside footprints (layer, text, board x,y; h text height)
C51: Top Overlay "+" at 1130,280 h59.06 r90
C52: Top Overlay "+" at 870,280 h59.06 r90
"Digital IO Higher Byte1": Top Overlay "SCL" at 2105,1815 h78.74 r90; Top Overlay "SDA" at 2195,1810 h78.74 r90; Top Overlay "AREF" at 2300,1770 h78.74 r90; Top Overlay "GND" at 2405,1805 h78.74 r90; Top Overlay "~ 13" at 2505,1800 h78.74 r90; Top Overlay "12" at 2605,1855 h78.74 r90; Top Overlay "~ 11" at 2700,1795 h78.74 r90; Top Overlay "~ 10" at 2805,1795 h78.74 r90; Top Overlay "~ 9" at 2905,1835 h78.74 r90; Top Overlay "8" at 3005,1890 h78.74 r90
"Digital IO Lower Byte1": Top Overlay "7" at 3165,1895 h78.74 r90; Top Overlay "~ 6" at 3265,1835 h78.74 r90; Top Overlay "~ 5" at 3365,1835 h78.74 r90; Top Overlay "4" at 3465,1890 h78.74 r90; Top Overlay "~ 3" at 3565,1835 h78.74 r90; Top Overlay "2" at 3665,1890 h78.74 r90; Top Overlay "TX 1" at 3760,1790 h78.74 r90; Top Overlay "RX 0" at 3865,1785 h78.74 r90
"Power & Reset1": Top Overlay "IOREF" at 2565,170 h78.74 r90; Top Overlay "RESET" at 2660,170 h78.74 r90; Top Overlay "3.3V" at 2765,170 h78.74 r90; Top Overlay "5V" at 2860,170 h78.74 r90; Top Overlay "GND" at 2960,170 h78.74 r90; Top Overlay "GND" at 3065,170 h78.74 r90; Top Overlay "VIN" at 3165,170 h78.74 r90